# Altium PCB V_4.PcbDoc
Units mil, origin at the board's own origin, x right, y up, seen from the top; angles counter-clockwise.
Board outline 6000 x 4000 mil, 2 copper layers (Top Layer, Bottom Layer); 5 components, 7 nets, 80 pads, 14 vias.
Unrouted connection lines stored in the file: 1.
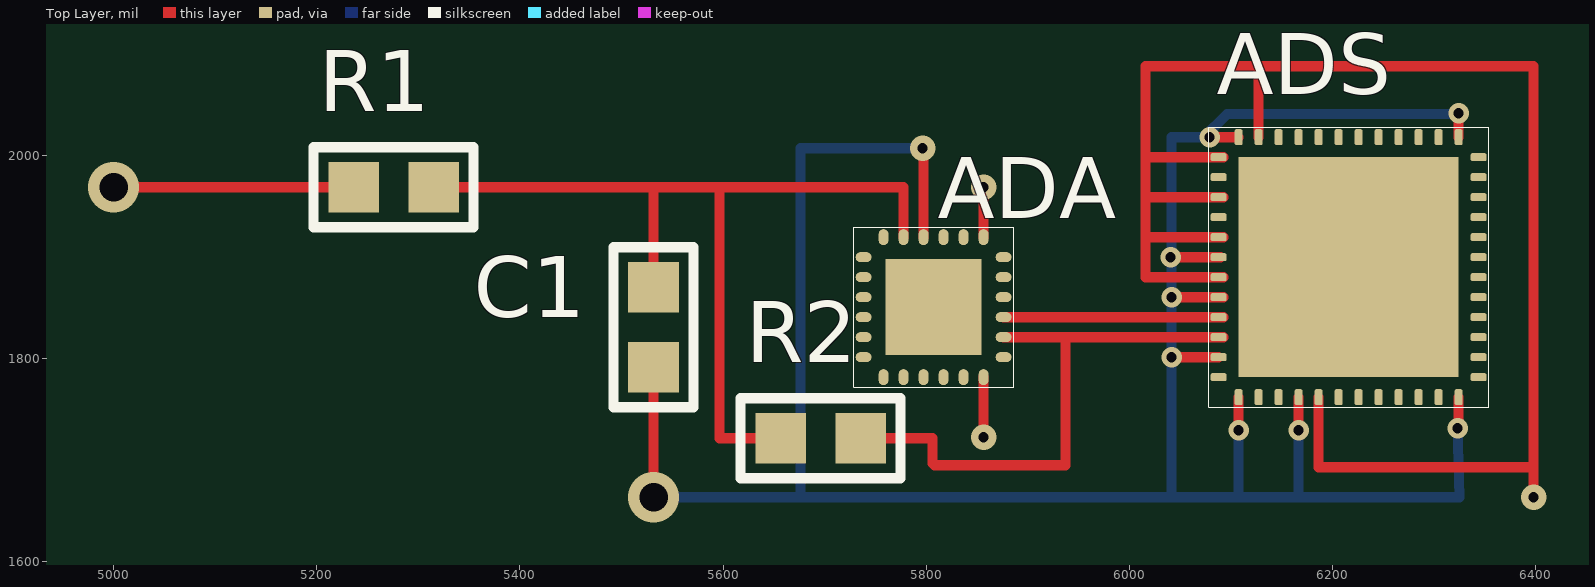
[diagram p0: Top Layer view]
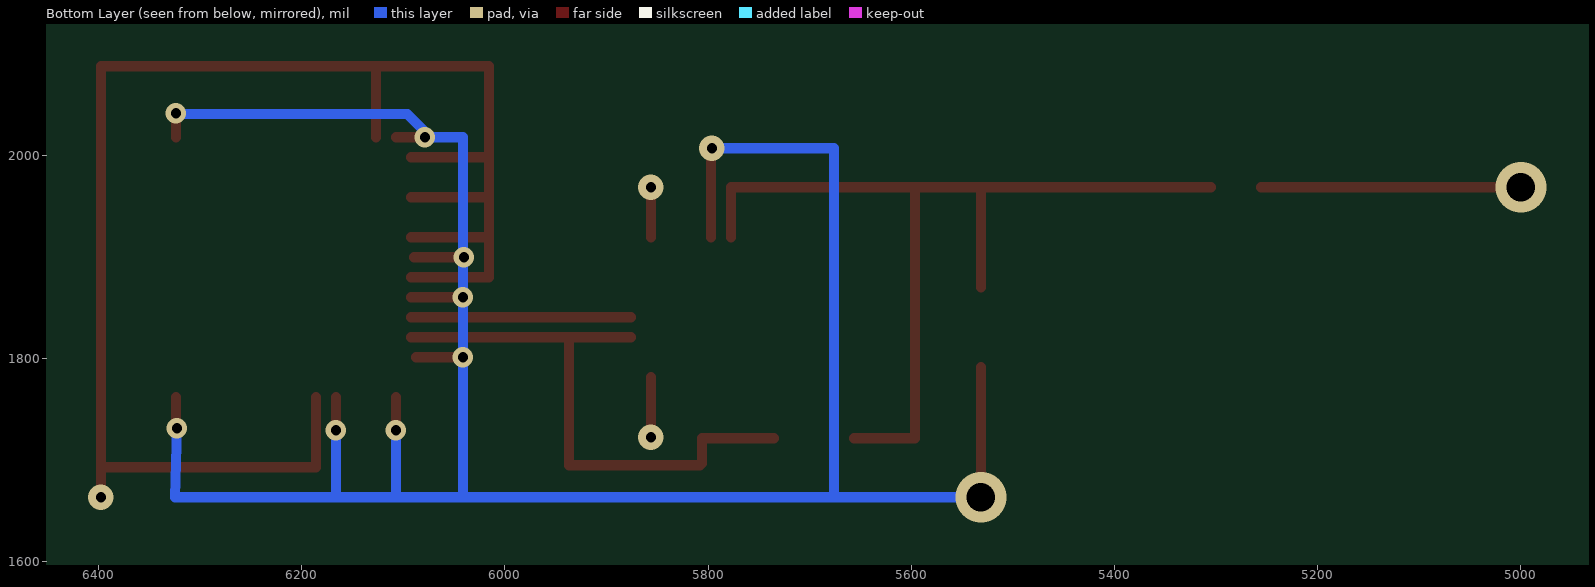
[diagram p1: Bottom Layer view, seen from below]

## Layer stack, top to bottom
Top Layer: signal copper 1.4
Dielectric: dielectric 12.6, FR-4, Dk 4.8
Bottom Layer: signal copper 1.4

## Board outline
1000,1000 7000,1000 7000,5000 1000,5000

## Design rules (kind name [scope] priority, off if disabled: settings)
Clearance [All] p1: gap=10
PolygonConnect [All] p1: connectstyle=Relief reliefconductorwidth=10 reliefentries=4 polygonreliefangle="90 Angle" airgapwidth=10
RoutingVias [All] p1: holewidth=28 width=50 viastyle="Through Hole" minholewidth=28 minwidth=50 maxholewidth=28 maxwidth=50
SilkscreenOverComponentPads [All] p1: minsilkscreentomaskgap=10
SolderMaskExpansion [All] p1: expansion=4
Width [All] p1: maxlimit=10 minlimit=10 preferedwidth=10
27 further rules are at their usual default settings.

## Classes and differential pairs
component class V_4: ADS C1 R1 R2

## Components (designator, comment, footprint, x,y, rotation, side; value= is the part's Value field where it differs from the comment)
ADA "ADA1" ADA 5807.09,1850.39 r90 top (schematic designator *)
ADS "ADS" ADS 6215.55,1889.76 r180 top (schematic designator *)
C1 "condenser" condenser 5531.5,1791.34 r90 top (schematic designator C3)
R1 "resistor" resistor 5236.22,1968.5 r0 top
R2 "resistor" resistor 5656.5,1721.46 r0 top

## Footprints (in the part's own frame and the unit in brackets; to place one, negate y for a bottom-side part, rotate by r counter-clockwise, add the part's x,y. Pads: shape width x height; smd on the part's side, far side on the other; paste and mask are expansions set on the pad)
ADA [mm]
  rect 2.4x2.4 smd: 0(0,0)
  oval 0.4x0.25 smd: 1(1.75,1.25) 2(1.75,0.75) 3(1.75,0.25) 4(1.75,-0.25) 5(1.75,-0.75) 6(1.75,-1.25) 13(-1.75,-1.25) 14(-1.75,-0.75) 15(-1.75,-0.25) 16(-1.75,0.25) 17(-1.75,0.75) 18(-1.75,1.25)
  oval 0.25x0.4 smd: 7(1.25,-1.75) 8(0.75,-1.75) 9(0.25,-1.75) 10(-0.25,-1.75) 11(-0.75,-1.75) 12(-1.25,-1.75) 19(-1.25,1.75) 20(-0.75,1.75) 21(-0.25,1.75) 22(0.25,1.75) 23(0.75,1.75) 24(1.25,1.75)
  silkscreen extent -2,-2 2,2
ADS [mm]
  rect 5.5x5.5 smd: 0(0,0)
  rrect50% 0.2x0.4 smd: 1(-2.75,3.25) 2(-2.25,3.25) 3(-1.75,3.25) 4(-1.25,3.25) 5(-0.75,3.25) 6(-0.25,3.25) 7(0.25,3.25) 8(0.75,3.25) 9(1.25,3.25) 10(1.75,3.25) 11(2.25,3.25) 12(2.75,3.25) 25(2.75,-3.25) 26(2.25,-3.25) 27(1.75,-3.25) 28(1.25,-3.25) 29(0.75,-3.25) 30(0.25,-3.25) 31(-0.25,-3.25) 32(-0.75,-3.25) 33(-1.25,-3.25) 34(-1.75,-3.25) 35(-2.25,-3.25) 36(-2.75,-3.25)
  rrect50% 0.4x0.2 smd: 13(3.25,2.75) 14(3.25,2.25) 15(3.25,1.75) 16(3.25,1.25) 17(3.25,0.75) 18(3.25,0.25) 19(3.25,-0.25) 20(3.25,-0.75) 21(3.25,-1.25) 22(3.25,-1.75) 23(3.25,-2.25) 24(3.25,-2.75) 37(-3.25,-2.75) 38(-3.25,-2.25) 39(-3.25,-1.75) 40(-3.25,-1.25) 41(-3.25,-0.75) 42(-3.25,-0.25) 42(-3.25,0.75) 43(-3.25,0.25) 43(-3.25,1.25) 44(-3.25,1.75) 47(-3.25,2.25) 48(-3.25,2.75)
  silkscreen extent -3.5,-3.5 3.5,3.5
condenser [mm]
  rect 1.26x1.27 smd: 2(0,0) 3(2,0)
  silkscreen extent -1,-1 3,1
resistor [mm]
  rect 1.26x1.27 smd: 2(0,0) 3(2,0)
  silkscreen extent -1,-1 3,1

## Via types
v1: diameter 20, hole 10, Top Layer to Bottom Layer, 8 vias
v2: diameter 25, hole 10, Top Layer to Bottom Layer, 4 vias
v3: diameter 50, hole 28, Top Layer to Bottom Layer, 2 vias

## Nets (pads, with @x,y where several pads share a name; then routed paths per layer and width w, separated by ;. In a path a pad name is that pad's centre, name@x,y a point inside that pad or via, vN(x,y) a via of type N, cw(c..) or ccw(c..) an arc to the next point about the centre after c; other vN are vias at no path point)
"+ 5V": ADA.6 ADA.13 | length 108.3
  Top Layer w10: v2(5856.3,1722.44) ADA.13 ; ADA.6 v2(5856.3,1968.5)
"-5 V": ADA.5
GND: ADA.3 ADS.1 ADS.9 ADS.12 ADS.14 ADS.17 ADS.19 ADS.25 ADS.36 C1.2 | length 2609.9
  Top Layer w10: v3(5531.5,1663.39) C1.2 ; ADA.3 v2@5797.24,2006.89 ; v1(6040.35,1899.61) ADS.19@6089.25,1899.61 ; v1(6041.34,1801.18) ADS.14 ; v1(6041.34,1860.24) ADS.17@6092.52,1860.24 ; v1(6078.74,2017.72) ADS.25 ; v1(6107.28,1729.33) ADS.12 ; v1(6166.34,1729.33) ADS.9 ; v1@6323.82,1731.3 ADS.1 ; ADS.36 v1(6323.82,2041.34)
  Bottom Layer w10: v3(5531.5,1663.39) 6324.8,1663.39 v1(6322.83,1731.3) ; 5676.18,1665.35 5676.18,2006.89 v2(5796.26,2006.89) v2@5797.24,2006.89 ; 6041.34,1663.39 v1(6041.34,1801.18) ; v1@6041.34,1801.5 6041.34,2017.72 v1@6077.76,2017.72 ; v1@6073.15,2017.72 6096.02,2040.59 v1@6319.88,2040.59 ; 6107.28,1663.39 v1(6107.28,1729.33) ; 6166.34,1665.35 v1(6166.34,1729.33)
Net*_2: ADA.2 C1.3 R1.3 R2.2 | length 924.2
  Top Layer w10: R1.3@5305.12,1968.5 5531.5,1968.5 ; C1.3 5531.5,1968.5 ; 5596.46,1965.55 5596.46,1721.46 R2.2 ; ADA.2 5777.56,1968.5 5531.5,1968.5
Net*_10: ADA.10 ADS.16 | length 216.5
  Top Layer w10: ADA.10 ADS.16@6092.52,1840.55
Net*_11: ADA.11 ADS.15 R2.3 | length 567.7
  Top Layer w10: R2.3 5806.1,1721.46 5806.1,1696.85 5808.07,1694.88 5937.01,1694.88 5937.01,1818.9 ; ADA.11 ADS.15@6092.52,1820.87
NetR1_2: R1.2 | length 255.9
  Top Layer w10: v3(5000,1968.5) R1.2@5255.91,1968.5
pads on no net: ADA.0 ADA.1 ADA.4 ADA.7 ADA.8 ADA.9 ADA.12 ADA.14 ADA.15 ADA.16 ADA.17 ADA.18 ADA.19 ADA.20 ADA.21 ADA.22 ADA.23 ADA.24 ADS.0 ADS.2 ADS.3 ADS.4 ADS.5 ADS.6 ADS.7 ADS.8 ADS.10 ADS.11 ADS.13 ADS.18 ADS.20 ADS.21 ADS.22 ADS.23 ADS.24 ADS.26 ADS.27 ADS.28 ADS.29 ADS.30 ADS.31 ADS.32 ADS.33 ADS.34 ADS.35 ADS.37 ADS.38 ADS.39 ADS.40 ADS.41 ADS.42 ADS.43 ADS.44 ADS.47 ADS.48
copper on no net: | length 1669.3
  Top Layer w10: 6015.75,1919.29 6092.52,1919.29 ; 6015.75,1958.66 6092.52,1958.66 ; 6015.75,1998.03 6092.52,1998.03 ; 6092.52,1879.92 6015.75,1879.92 6015.75,2087.6 6347.44,2087.6 6397.64,2087.6 6397.64,1692.91 ; 6126.97,2017.72 6126.97,2085.63 ; 6186.02,1761.81 6186.02,1692.91 6397.64,1692.91 ; v2(6397.64,1663.39) 6397.64,1692.91

## Silkscreen, mask and mechanical layers (free items; w line width, h text height)
Top Solder:
  lines w9.84: 4330.71,1574.8 6692.91,1574.8 6692.91,2362.2 4330.71,2362.2 4330.71,1574.8